# EAGLE board ECE411 Practicum Schematic (EAGLE 9.6.2)
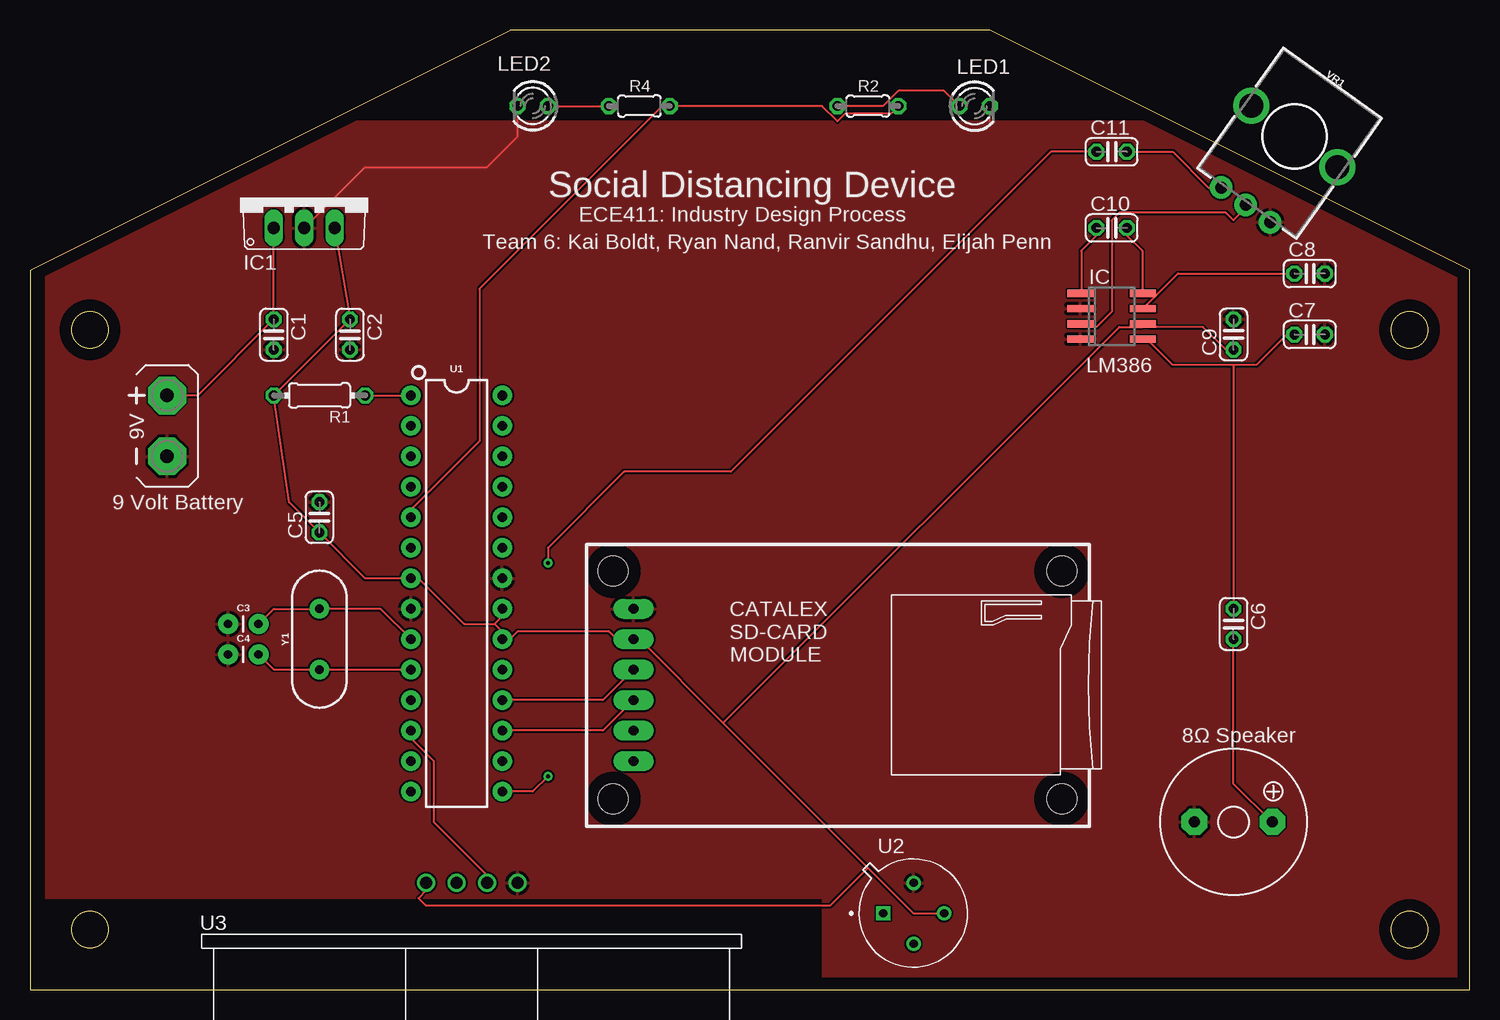
[diagram p0: board, top side]
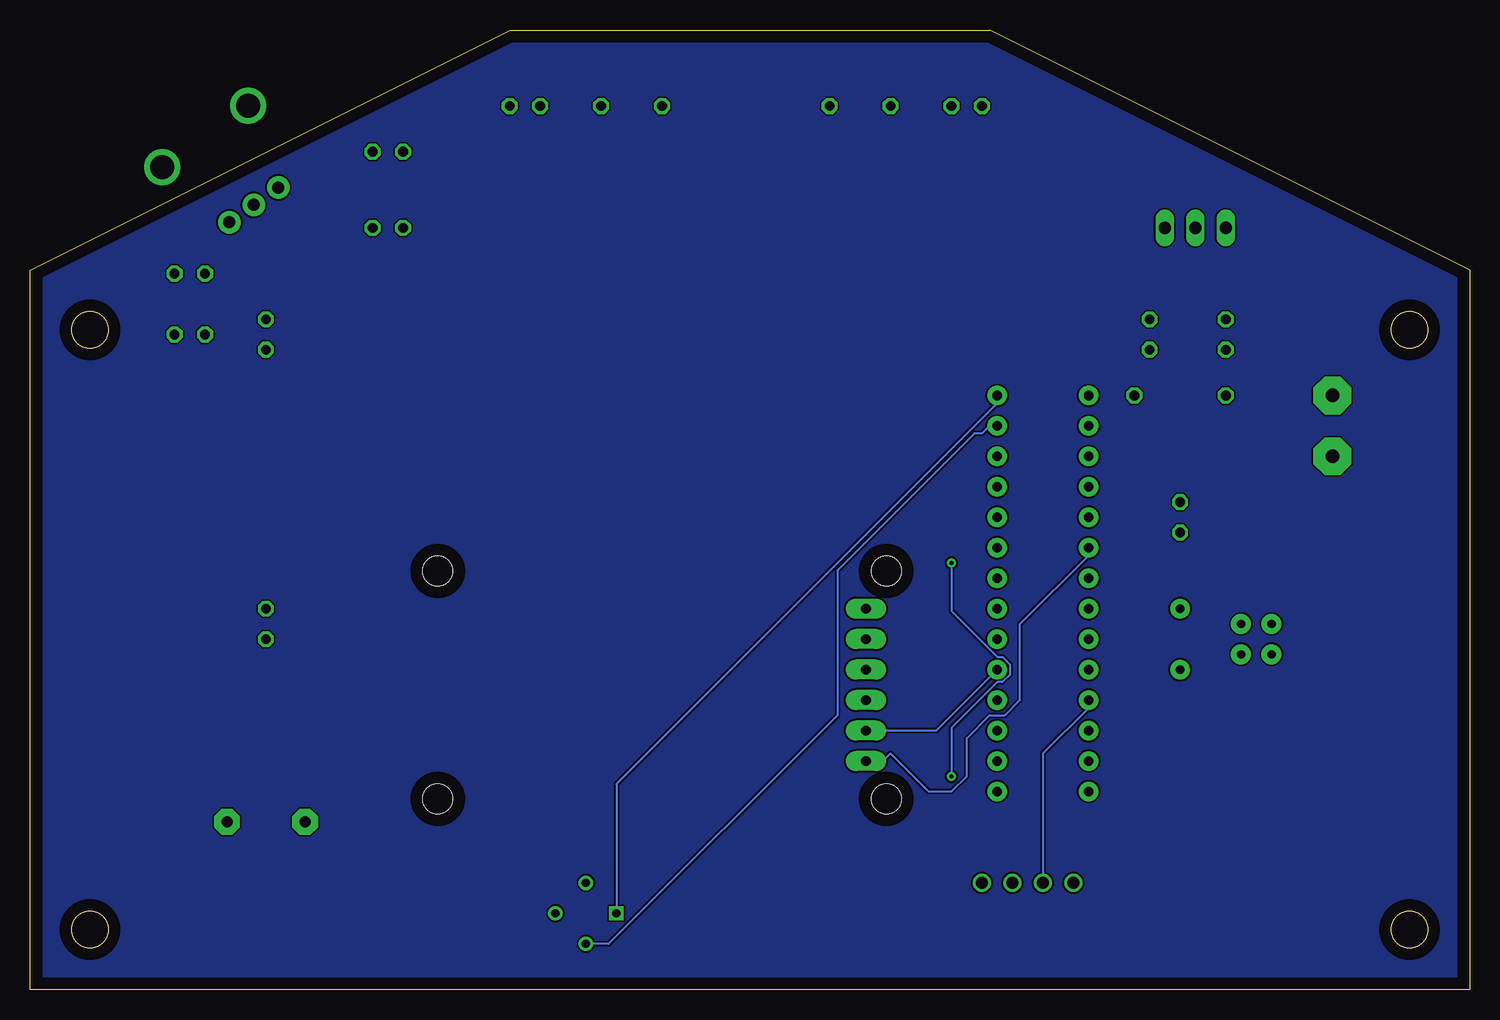
[diagram p1: board, bottom side, seen from below]

Size 120 x 80 mm. Coordinates in mm from the lower left corner, seen from the top.
Outline: 0,60 0,0 120,0 120,60 80,80 40,80 0,60
Outline: circle at 115,55 radius 1.5
Outline: circle at 5,55 radius 1.5
Outline: circle at 115,5 radius 1.5
Outline: circle at 5,5 radius 1.5
Copper layers (1*16): Top 0.035mm / dielectric 1.5mm / Bottom 0.035mm
Design rules "default": minimum track width 6mil, minimum drill 0.35mm, track to track 6mil, track to pad 6mil, pad to pad 6mil, via to via 6mil, smd to smd 6mil, copper to edge 40mil, drill to drill 6mil, minimum pad ring 10mil, minimum via ring 8mil, stop-mask expansion 4mil, vias tented up to drill 0mil, thermal gap 10mil

## Footprints (pad centres in the part's own frame; a part is rotated, then mirrored left to right if it is on the bottom)
C025-024X044 = drill 0.813 octagon: 1 -1.27,0; 2 1.27,0
CAP-PTH-2.54 = drill 0.7 pad 1.651: 1 -1.27,0; 2 1.27,0
AB9V = drill 1.118 pad 3.15 octagon: + 0,2.54; - 0,-2.54
SO08 = smd 0.6 x 2.2: 1 -1.905,-2.6; 2 -0.635,-2.6; 3 0.635,-2.6; 4 1.905,-2.6; 5 1.905,2.6; 6 0.635,2.6; 7 -0.635,2.6; 8 -1.905,2.6
TO220V = drill 1.016 long: 1 -2.54,-2.54; 2 0,-2.54; 3 2.54,-2.54
LED3MM = drill 0.813 octagon: A -1.27,0; K 1.27,0
CARD-SD-ADAPTER-CATALEX = drill 0.8 pad 1.676 long: CS -17,-6.35; GND -17,6.35; MISO -17,1.27; MOSI -17,-1.27; SCK -17,-3.81; VCC5V -17,3.81 | hole 2.5: -18.7,9.5; 18.7,9.5; 18.7,-9.5; -18.7,-9.5
0204/7 = drill 0.813 octagon: 1 -3.81,0; 2 3.81,0
0204/5 = drill 0.813 octagon: 1 -2.54,0; 2 2.54,0
KSS1201 = drill 0.914 pad 2.159 octagon: + 3.251,0; - -3.251,0
DIP28 = drill 0.813 pad 1.626: 1 -16.51,-3.81; 2 -13.97,-3.81; 3 -11.43,-3.81; 4 -8.89,-3.81; 5 -6.35,-3.81; 6 -3.81,-3.81; 7 -1.27,-3.81; 8 1.27,-3.81; 9 3.81,-3.81; 10 6.35,-3.81; 11 8.89,-3.81; 12 11.43,-3.81; 13 13.97,-3.81; 14 16.51,-3.81; 15 16.51,3.81; 16 13.97,3.81; 17 11.43,3.81; 18 8.89,3.81; 19 6.35,3.81; 20 3.81,3.81; 21 1.27,3.81; 22 -1.27,3.81; 23 -3.81,3.81; 24 -6.35,3.81; 25 -8.89,3.81; 26 -11.43,3.81; 27 -13.97,3.81; 28 -16.51,3.81
TO254P942H425-4 = drill 0.69 pad 1.09 square: 1 -2.54,0 | drill 0.69 pad 1.09: 2 0,-2.54; 3 2.54,0; 4 0,2.54
XCVR_HC-SR04 = drill 1.02: 1 -3.81,0; 2 -1.27,0; 3 1.27,0; 4 3.81,0
POT-PTH-ALPS-KIT = drill 1 pad 1.88: P$1 7,-2.5; P$2 7,0; P$3 7,2.5 | drill 2: P$4 0,-4.4; P$5 0,4.4
HC49US = drill 0.7 pad 1.651: 1 -2.54,0; 2 2.54,0

## Placement (x,y rotation side)
C1  10u  [C025-024X044]  20.32,54.61 270 top
C2  10u  [C025-024X044]  26.67,54.61 270 top
C3  22pF  [CAP-PTH-2.54]  17.78,30.48 0 top
C4  22pF  [CAP-PTH-2.54]  17.78,27.94 0 top
C5  10u  [C025-024X044]  24.13,39.37 90 top
C6  1000uF  [C025-024X044]  100.33,30.48 270 top
C7  100nF  [C025-024X044]  106.68,54.61 0 top
C8  100uF  [C025-024X044]  106.68,59.69 0 top
C9  100uF  [C025-024X044]  100.33,54.61 90 top
C10  10uF  [C025-024X044]  90.17,63.5 0 top
C11  10uF  [C025-024X044]  90.17,69.85 0 top
G1  AB9V  [AB9V]  11.43,46.99 0 top
IC  LM386M-1  [SO08]  90.17,56.13 270 top
IC1  7805TV  [TO220V]  22.86,66.04 0 top
LED1  [LED3MM]  78.74,73.66 0 top
LED2  [LED3MM]  41.91,73.66 180 top
MOD1  CARD-SD-ADAPTER-CATALEX  [CARD-SD-ADAPTER-CATALEX]  67.31,25.4 0 top
R1  10k  [0204/7]  24.13,49.53 180 top
R2  1k  [0204/5]  69.85,73.66 0 top
R4  1k  [0204/5]  50.8,73.66 0 top
SP1  KSS1201  [KSS1201]  100.33,13.97 0 top
U1  328P  [DIP28]  35.56,33.02 270 top
U2  MLX90614ESF-BAA-000-TU  [TO254P942H425-4]  73.66,6.35 0 top
U3  HC-SR04  [XCVR_HC-SR04]  36.83,8.89 0 top
VR1  10k  [POT-PTH-ALPS-KIT]  105.41,71.12 234.5 top
Y1  16MHz  [HC49US]  24.13,29.21 90 top

## Library data of the parts
C1 C2 C5-C11 = rcl; SPICEPREFIX: C
C3 C4 = SparkFun-Capacitors; PROD_ID: CAP-09128
G1 = battery
IC IC1 = linear
LED1 LED2 = led
MOD1 = SD-Card-Module_CATALEX
R1 R2 R4 = rcl; SPICEPREFIX: R
SP1 = buzzer; OC_FARNELL: unknown; OC_NEWARK: unknown
U1 = SparkFun-IC-Microcontroller; PROD_ID: IC-09136
U2 = MLX90614ESF-BAA-000-TU; AVAILABILITY: Warning; DESCRIPTION: Temperature Sensor Digital, Infrared (IR) -40°C ~ 85°C 16 b TO-39; MF: Melexis; MP: MLX90614ESF-BAA-000-TU; PACKAGE: TO-39 Melexis; PRICE: None; PURCHASE-URL: https://pricing.snapeda.com/search/part/MLX90614ESF-BAA-000-TU/?ref=eda
U3 = HC-SR04; AVAILABILITY: Warning; DESCRIPTION: HC-SR04 Ultrasonic Sensor Platform Evaluation Expansion Board; MF: SparkFun Electronics; MP: HC-SR04; PACKAGE: None; PRICE: None; PURCHASE-URL: https://pricing.snapeda.com/search/part/HC-SR04/?ref=eda
VR1 = SparkFun-Resistors; PROD_ID: RES-09177; SF_SKU: COM-09288
Y1 = SparkFun-Clocks; PROD_ID: XTAL-08181; SF_ID: COM-00536

## Nets
+9V: C1.1 G1.+ IC1.1
GND: C1.2 C2.2 C3.1 C4.1 C5.2 C7.2 C8.2 C9.2 G1.- IC1.2 IC.2 IC.4 LED1.K LED2.K MOD1.GND SP1.- U1.8 U1.22 U2.4 U3.4 VR1.P$3
N$1: C3.2 U1.9 Y1.2
N$2: R1.1 U1.1
N$3: C4.2 U1.10 Y1.1
N$4: MOD1.CS U1.6
N$6: U1.27 U2.2
N$7: MOD1.SCK U1.19
N$8: C8.1 IC.7
N$9: C6.1 C7.1 IC.5
N$10: C10.2 IC.8
N$11: IC.3 VR1.P$2
N$12: C10.1 IC.1
N$13: C11.2 VR1.P$1
N$14: C11.1 U1.15
N$15: MOD1.MISO U1.18
N$16: U1.28 U2.1
N$17: MOD1.MOSI U1.17
N$18: U1.11 U3.2
N$19: U1.12 U3.3
N$20: R2.2 R4.2 U1.5
N$21: LED1.A R2.1
N$22: LED2.A R4.1
VCC: C2.1 C5.1 C9.1 IC1.3 IC.6 MOD1.VCC5V R1.2 U1.7 U1.20 U1.21 U2.3 U3.1
VO: C6.2 SP1.+

## Tracks (layer width: path | path; a pad name or v marks a point on that pad's centre or on a via)
+9V
  Top 0.152: G1.+ 13.97,49.53 C1.1 IC1.1
GND
  Top 0.152: IC1.2 27.94,68.58 38.1,68.58 40.64,71.12 LED2.K | 80.01,72.39 LED1.K
  pour Top: 119.38,59.69 93.98,72.39 26.67,72.39 1.27,59.69 1.27,7.62 66.04,7.62 66.04,0 119.38,0 119.38,58.42
N$1
  Top 0.152: U1.9 29.21,31.75 Y1.2 20.32,31.75 C3.2
N$2
  Top 0.152: R1.1 U1.1
N$3
  Top 0.152: U1.10 Y1.1 20.32,26.67 C4.2
N$4
  Bottom 0.152: U1.6 31.75,36.2 37.47,30.48 37.47,24.13 38.73,22.86 40.01,22.86 41.91,20.95 41.91,17.78 43.18,16.51 45.09,16.51 48.26,19.68 48.9,19.05 MOD1.CS
N$5
  pour Bottom: 120,0 0,0 0,60 40,80 80,80 120,60
N$6
  Bottom 0.152: U2.2 71.75,3.81 52.7,22.86 52.7,34.92 41.27,46.35 40.64,46.35 40.01,46.99 U1.27
N$7
  Bottom 0.152: MOD1.SCK 44.45,21.59 U1.19
N$8
  Top 0.152: IC.7 95.69,59.69 C8.1
N$9
  Top 0.152: 100.33,52.07 102.23,52.07 104.78,54.61 C7.1 | 100.33,52.07 95.25,52.07 93.34,53.98 IC.5 | 100.33,52.07 C6.1
N$10
  Top 0.152: C10.2 91.44,62.87 92.71,61.59 92.71,57.78 IC.8
N$11
  Top 0.152: IC.3 87.63,55.24 88.9,55.24 90.17,56.52 90.17,64.14 90.81,64.77 99.69,64.77 100.33,64.14 101.6,65.41 VR1.P$2
N$12
  Top 0.152: C10.1 88.9,62.87 87.63,61.59 87.63,57.78 IC.1
N$13
  Top 0.152: VR1.P$1 98.23,66.87 95.25,69.85 C11.2
N$14  (via drill 0.35)
  Top 0.152: C11.1 85.09,69.85 58.42,43.18 49.53,43.18 43.18,36.83 v43.18,35.56 | v43.18,17.78 41.91,16.51 U1.15
  Bottom 0.152: v43.18,35.56 43.18,31.55 39.34,27.71 38.94,27.71 38.33,27.1 38.33,26.24 38.94,25.63 39.34,25.63 43.18,21.79 v43.18,17.78
N$15
  Top 0.152: MOD1.MISO 47.77,24.13 U1.18
N$16
  Bottom 0.152: U2.1 71.12,17.14 39.37,48.9 U1.28
N$17
  Top 0.152: MOD1.MOSI 47.77,21.59 U1.17
N$18
  Bottom 0.152: U3.2 35.56,19.68 31.75,23.5 U1.11
N$19
  Top 0.152: U3.3 38.1,9.53 33.66,13.97 33.66,19.05 31.75,20.95 U1.12
N$20
  Top 0.152: R2.2 71.75,73.03 67.94,73.03 67.31,72.39 66.04,73.66 R4.2 52.7,73.66 37.47,58.42 37.47,45.72 31.75,40.01 U1.5
N$21
  Top 0.152: R2.1 71.12,73.66 72.39,74.93 76.2,74.93 LED1.A
N$22
  Top 0.152: LED2.A R4.1
VCC
  Top 0.152: IC1.3 C2.1 R1.2 21.59,40.64 C5.1 27.94,34.29 U1.7 32.38,34.29 36.2,30.48 38.73,30.48 | 38.73,30.48 39.37,29.84 U1.20 40.01,29.21 40.64,29.84 48.26,29.84 48.9,29.21 MOD1.VCC5V 50.8,29.21 57.78,22.23 | 38.73,30.48 39.37,31.11 U1.21 | C9.1 99.69,53.34 97.79,55.24 93.34,55.24 IC.6 92.71,55.24 90.81,55.24 57.78,22.23 | U2.3 73.66,6.35 69.85,10.16 | 57.78,22.23 69.85,10.16 | U3.1 33.02,8.26 32.38,7.62 33.02,6.99 66.67,6.99 69.85,10.16
VO
  Top 0.152: C6.2 100.33,17.14 103.5,13.97 SP1.+

## Text on the board
tPlace: Social Distancing Device | ECE411: Industry Design Process | Team 6: Kai Boldt, Ryan Nand, Ranvir Sandhu, Elijah Penn | LM386 | 9 Volt Battery | 8Ω Speaker